# EAGLE board isp_hvp_shield_topor_02 (EAGLE 7.2.0)
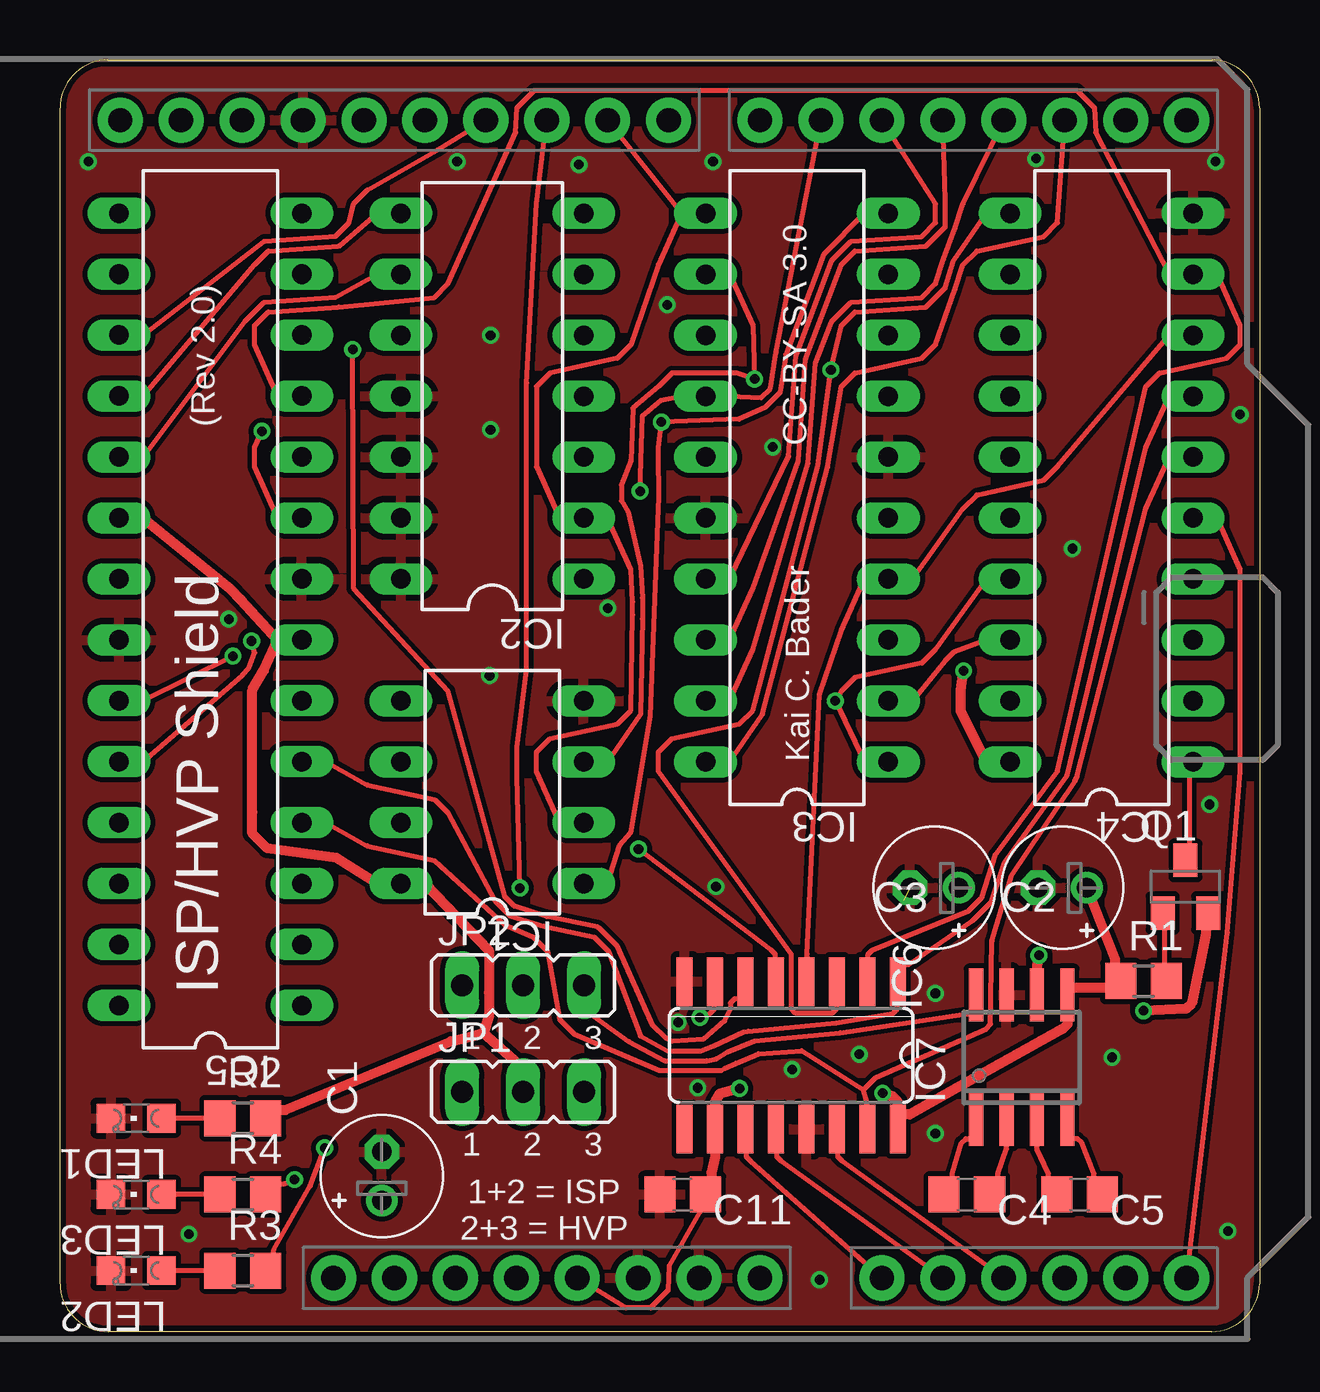
[diagram p0: board, top side]
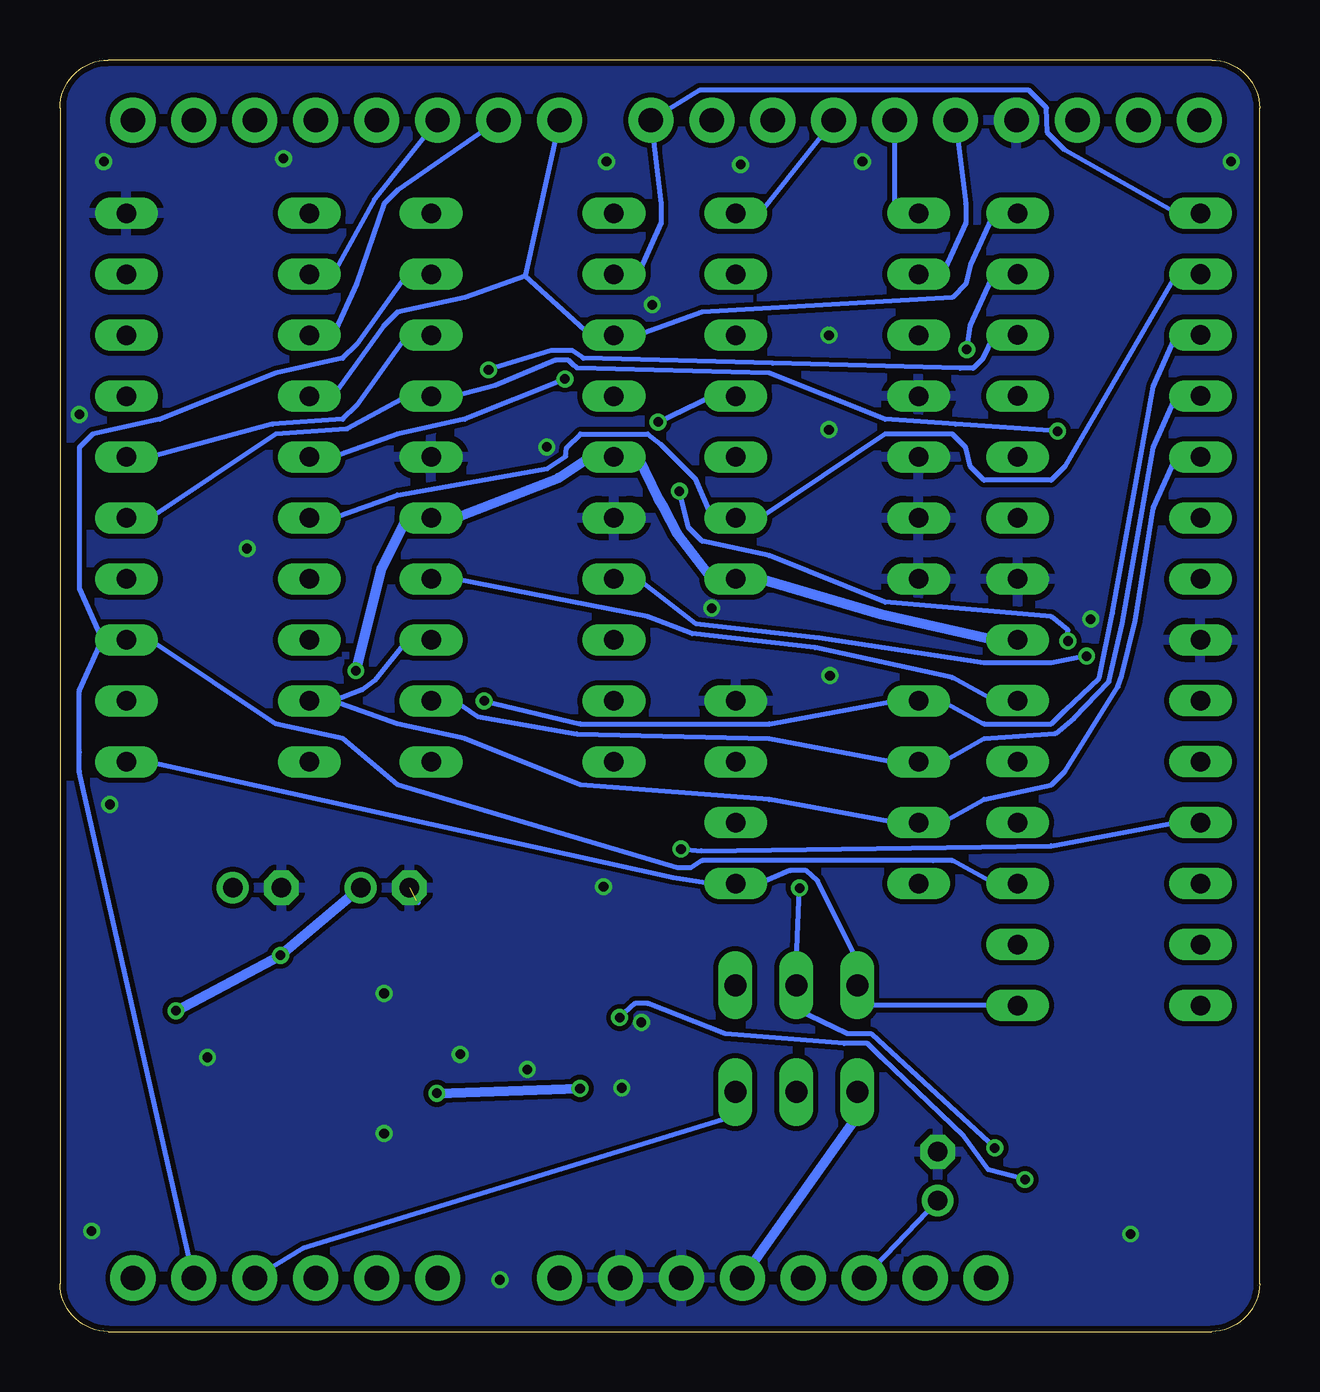
[diagram p1: board, bottom side, seen from below]

Size 50 x 53 mm. Coordinates in mm from the lower left corner, seen from the top.
Outline: 0,2 0,51 arc-90 2,53 48,53 arc-90 50,51 50,2 arc-90 48,0 2,0 arc-90 0,2
Copper layers (1*16): TOP 0.035mm / dielectric 1.5mm / BOTTOM 0.035mm
Design rules "SeeedStudio_2layer_DRU_no_angle_20140221": minimum track width 6mil, minimum drill 12mil, track to track 6mil, track to pad 6mil, pad to pad 6mil, via to via 6mil, smd to smd 0mil, copper to edge 10mil, drill to drill 10mil, minimum pad ring 10mil, minimum via ring 6mil, stop-mask expansion 2mil, vias tented up to drill 100mil, thermal gap 10mil
Net classes: 0 default: width 0.203 mm, clearance 0.203 mm

## Footprints (pad centres in the part's own frame; a part is rotated, then mirrored left to right if it is on the bottom)
E2-5 = drill 0.813 pad 1.321: + -1.016,0 | drill 0.813 pad 1.429 octagon: - 1.016,0
C0805 = smd 1.3 x 1.5: 1 -0.95,0; 2 0.95,0
DIL08 = drill 0.813 pad 1.321 long: 1 -3.81,-3.81; 2 -1.27,-3.81; 3 1.27,-3.81; 4 3.81,-3.81; 5 3.81,3.81; 6 1.27,3.81; 7 -1.27,3.81; 8 -3.81,3.81
DIL14 = drill 0.813 pad 1.321 long: 1 -7.62,-3.81; 2 -5.08,-3.81; 3 -2.54,-3.81; 4 0,-3.81; 5 2.54,-3.81; 6 5.08,-3.81; 7 7.62,-3.81; 8 7.62,3.81; 9 5.08,3.81; 10 2.54,3.81; 11 0,3.81; 12 -2.54,3.81; 13 -5.08,3.81; 14 -7.62,3.81
DIL20 = drill 0.813 pad 1.321 long: 1 -11.43,-3.81; 2 -8.89,-3.81; 3 -6.35,-3.81; 4 -3.81,-3.81; 5 -1.27,-3.81; 6 1.27,-3.81; 7 3.81,-3.81; 8 6.35,-3.81; 9 8.89,-3.81; 10 11.43,-3.81; 11 11.43,3.81; 12 8.89,3.81; 13 6.35,3.81; 14 3.81,3.81; 15 1.27,3.81; 16 -1.27,3.81; 17 -3.81,3.81; 18 -6.35,3.81; 19 -8.89,3.81; 20 -11.43,3.81
DIL28 = drill 0.813 pad 1.321 long: 1 -11.43,-3.81; 2 -8.89,-3.81; 3 -6.35,-3.81; 4 -3.81,-3.81; 5 -1.27,-3.81; 6 1.27,-3.81; 7 3.81,-3.81; 8 6.35,-3.81; 9 8.89,-3.81; 10 11.43,-3.81; 11 13.97,-3.81; 12 16.51,-3.81; 13 19.05,-3.81; 14 21.59,-3.81; 15 21.59,3.81; 16 19.05,3.81; 17 16.51,3.81; 18 13.97,3.81; 19 11.43,3.81; 20 8.89,3.81; 21 6.35,3.81; 22 3.81,3.81; 23 1.27,3.81; 24 -1.27,3.81; 25 -3.81,3.81; 26 -6.35,3.81; 27 -8.89,3.81; 28 -11.43,3.81
SO16 = smd 0.66 x 2.032: 1 -4.445,-3.073; 2 -3.175,-3.073; 3 -1.905,-3.073; 4 -0.635,-3.073; 5 0.635,-3.073; 6 1.905,-3.073; 7 3.175,-3.073; 8 4.445,-3.073; 9 4.445,3.073; 10 3.175,3.073; 11 1.905,3.073; 12 0.635,3.073; 13 -0.635,3.073; 14 -1.905,3.073; 15 -3.175,3.073; 16 -4.445,3.073
SO08 = smd 0.6 x 2.2: 1 -1.905,-2.6; 2 -0.635,-2.6; 3 0.635,-2.6; 4 1.905,-2.6; 5 1.905,2.6; 6 0.635,2.6; 7 -0.635,2.6; 8 -1.905,2.6
JP2 = drill 0.914 pad 1.422 long: 1 -2.54,0; 2 0,0; 3 2.54,0
CHIPLED_0805 = smd 1.2 x 1.2: A 0,-1.05; C 0,1.05
UNO_R3_SHIELD = drill 1.016 pad 1.88: 3.3V 50.8,26.67; 5V 50.8,29.21; A0 50.8,41.91; A1 50.8,44.45; A2 50.8,46.99; A3 50.8,49.53; A4 50.8,52.07; A5 50.8,54.61; AREF 2.54,15.24; D2 2.54,49.53; D3 2.54,46.99; D4 2.54,44.45; D5 2.54,41.91; D6 2.54,39.37; D7 2.54,36.83; D8 2.54,33.02; D9 2.54,30.48; D10 2.54,27.94; D11 2.54,25.4; D12 2.54,22.86; D13 2.54,20.32; GND@0 50.8,31.75; GND@1 50.8,34.29; GND@2 2.54,17.78; IOREF 50.8,21.59; NC 50.8,19.05; RES 50.8,24.13; RX 2.54,54.61; SCL 2.54,10.16; SDA 2.54,12.7; TX 2.54,52.07; VIN 50.8,36.83
SOT23-BEC = smd 1 x 1.4: B -0.95,-1.1; C 0,1.1; E 0.95,-1.1
R0805 = smd 1.3 x 1.5: 1 -0.95,0; 2 0.95,0

## Placement (x,y rotation side)
C1  10uF  [E2-5]  13.41,6.48 90 top
C2  4.7uF  [E2-5]  41.78,18.5 180 top
C3  4.7uF  [E2-5]  36.45,18.5 180 top
C4  0.22uF  [C0805]  37.8,5.71 180 top
C5  0.22uF  [C0805]  42.5,5.71 180 top
C11  0.1uF  [C0805]  25.95,5.71 180 top
IC1  ATtiny13/15/25/45/85  [DIL08]  18.02,22.48 90 top
IC2  ATtiny24/44/84  [DIL14]  18.02,38.99 90 top
IC3  TINY26/261/461/861  [DIL20]  30.72,35.18 90 top
IC4  ATtiny2313/4313  [DIL20]  43.42,35.18 90 top
IC5  ATMEGA328  [DIL28]  6.27,25.02 90 top
IC6  74HCT595D  [SO16]  30.48,11.51 180 top
IC7  MAX662A  [SO08]  40.09,11.43 0 top
JP1  [JP2]  19.3,9.99 0 top
JP2  [JP2]  19.3,14.43 0 top
LED1  [CHIPLED_0805]  3.17,8.89 90 top
LED2  [CHIPLED_0805]  3.17,2.54 90 top
LED3  [CHIPLED_0805]  3.17,5.71 90 top
PINS  [UNO_R3_SHIELD]  -7.65,53.03 270 top
Q1  BC858BSMD  [SOT23-BEC]  46.91,18.54 0 top
R1  47k  [R0805]  45.16,14.61 0 top
R2  220  [R0805]  7.62,8.89 0 top
R3  220  [R0805]  7.62,2.54 0 top
R4  220  [R0805]  7.62,5.71 0 top

## Library data of the parts
C1-C5 C11 R1-R4 = rcl
IC1-IC5 IC7 PINS = kaibader
IC6 = 74xx-eu
JP1 JP2 = jumper
LED1-LED3 = led
Q1 = transistor-pnp

## Nets
220: LED2.A R3.1
+5V: IC1.8 IC2.1 IC3.5 IC3.15 IC4.20 IC5.7 IC5.20 JP1.2 R2.2
A0_SCK: IC6.11 PINS.A0
A1_RCK: IC6.12 PINS.A1
A2_SER: IC6.14 PINS.A2
A3_POWER: JP1.3 PINS.A3
A4: IC3.9 IC4.3 IC5.3 PINS.A4
A5: IC3.7 IC4.5 IC5.9 PINS.A5
AREF: IC5.21
D2: IC3.20 PINS.D2
D3: IC3.19 PINS.D3
D4: IC3.18 PINS.D4
D5: IC3.17 IC4.12 IC5.23 PINS.D5
D6: IC3.14 IC4.13 IC5.24 PINS.D6
D7: IC3.13 IC4.14 IC5.14 PINS.D7
D8: IC1.3 IC3.12 IC4.15 IC5.15 PINS.D8
D9: IC1.2 IC2.2 IC3.11 IC4.16 IC5.16 PINS.D9
D10: JP2.2 PINS.D10 R3.2
D10_RESET: IC1.1 IC2.4 IC3.10 IC4.1 IC5.1 JP2.1 Q1.C
D11_MOSI: IC1.5 IC2.7 IC3.1 IC4.17 IC5.17 PINS.D11
D12_MISO: IC1.6 IC2.8 IC3.2 IC4.18 IC5.18 PINS.D12
D13_SCK: IC1.7 IC2.9 IC3.3 IC4.19 IC5.19 PINS.D13
GND: C1.- C2.- C3.- C11.2 IC1.4 IC2.11 IC2.12 IC2.13 IC2.14 IC3.6 IC3.16 IC4.10 IC5.8 IC5.22 IC6.8 IC6.13 IC7.7 LED1.C LED2.C LED3.C PINS.GND@0 PINS.GND@1 PINS.GND@2
N$1: IC7.8 JP2.3
N$2: C1.+ PINS.RES
N$3: Q1.B R1.2
N$4: C5.1 IC7.4
N$5: C5.2 IC7.3
N$6: C4.1 IC7.2
N$7: C4.2 IC7.1
N$8: LED1.A R2.1
N$10: LED3.A R4.1
Q0: IC3.8 IC4.6 IC5.4 IC6.15
Q1: IC4.7 IC5.5 IC6.1
Q2: IC4.9 IC5.11 IC6.2
Q3: IC4.11 IC5.12 IC6.3
Q4: IC3.4 IC4.8 IC5.6 IC6.4
Q5: IC5.25 IC6.5
Q6: IC5.13 IC6.6
Q7: IC6.7 R4.2
RX: PINS.RX
TX: PINS.TX
VCC: C2.+ C11.1 IC6.10 IC6.16 IC7.5 JP1.1 PINS.5V R1.1
VOUT: C3.+ IC7.6 Q1.E

## Tracks (layer width: path | path; a pad name or v marks a point on that pad's centre or on a via)
220
  TOP 0.203: R3.1 6.12,2.54 6.02,2.54 4.83,2.54 4.72,2.54 LED2.A
+5V  (via drill 0.4 pad 0.7)
  TOP 0.406: 9.08,28.83 8.5,27.54 8.01,26.73 8.01,21.66 8.01,20.77 8.64,20.14 11.52,19.74 13.21,18.67 IC1.8 15.21,18.67 17.88,15.89 17.88,14.13 17.88,13.21 17.65,12.46 | 9.08,28.83 IC5.7 9.08,28.83 | R2.2 9.02,9.23 9.22,9.23 9.39,9.23 16.3,12.1 17.23,12.31 17.65,12.46 | IC4.20 38.61,23.75 37.54,25.85 37.54,26.73 v37.67,27.54 | JP1.2 19.3,10.99 17.65,12.46 | IC5.20 3.46,33.91 7.1,30.96 7.54,30.52 9.08,28.83
  BOTTOM 0.406: v37.67,27.54 36.6,31.81 35.53,33.91 IC3.5 33.53,33.91 29.23,35.58 27.91,36.45 IC3.15 25.91,36.45 25.06,34.72 24.84,34.35 24.27,33.27 22.83,31.37 IC2.1 20.83,31.37 15.77,29.89 11.08,28.83 IC5.7
A0_SCK
  TOP 0.203: IC6.11 28.6,7.52 28.6,7.42 28.6,7.29 28.78,7.12 PINS.A0
A1_RCK
  TOP 0.203: IC6.12 29.87,7.52 29.87,7.42 29.87,7.29 30.05,7.12 PINS.A1
A2_SER
  TOP 0.203: IC6.14 32.41,7.52 32.41,7.42 32.41,7.29 32.59,7.12 PINS.A2
A3_POWER
  BOTTOM 0.203: JP1.3 21.84,8.99 39.85,3.48 PINS.A3
A4
  BOTTOM 0.203: PINS.A4 49.2,23.35 49.2,24.15 49.2,26.69 48.23,28.83 | 48.23,28.83 IC4.3 | IC3.9 35.53,44.07 37.64,41.13 38.21,40.56 41.01,39.95 45.83,38.02 48.63,37.41 49.2,36.85 49.2,31.77 49.2,30.97 48.23,28.83 | 48.23,28.83 IC4.3 | IC5.3 11.08,18.67 12.81,19.64 13.61,19.64 23.23,19.64 23.72,19.33 24.26,19.33 35.93,22.78 38.21,24.71 41.01,25.32 46.23,28.83 IC4.3
A5  (via drill 0.4 pad 0.7)
  TOP 0.203: PINS.A5 48.66,16.62 49.2,23.35 49.2,31.77 48.23,33.91 IC4.5 | IC5.9 9.08,33.91 8.11,36.05 8.11,36.85 v8.42,37.52
  BOTTOM 0.203: v8.42,37.52 12.67,37.82 15.61,38.02 20.43,39.95 28.45,40.16 28.62,40.3 28.81,40.49 29.35,40.49 31.86,39.43 33.53,38.99 IC3.7 35.53,38.99 38.02,37.63 38.07,37.62 41.01,37.41 46.23,33.91 IC4.5
D2
  TOP 0.203: IC3.20 27.91,23.75 29.27,25.7 29.28,25.75 31.99,36.02 32.56,39.39 33.13,39.95 35.93,40.56 36.5,41.13 37.31,43.44 37.64,44.47 38.21,45.03 41.01,45.64 41.58,46.21 PINS.D2
D3
  TOP 0.203: IC3.19 27.91,26.29 28.88,28.43 31.18,36.18 31.48,40.35 32.16,42.07 32.17,42.12 32.94,42.88 32.99,42.9 35.93,43.1 36.5,43.67 36.83,44.69 37.31,45.98 37.64,47.01 PINS.D3
D4
  TOP 0.203: IC3.18 27.91,28.83 28.88,30.97 30.77,36.3 31.07,40.52 32.56,44.47 33.13,45.03 36.07,45.24 36.12,45.25 36.89,46.02 36.9,46.06 36.9,47.15 PINS.D4
D5  (via drill 0.4 pad 0.7)
  TOP 0.203: IC5.23 3.46,26.29 v7.21,28.15 | IC3.17 27.91,31.37 30.36,36.47 30.67,40.65 32.16,44.61 32.17,44.66 32.94,45.42 32.99,45.44 35.93,45.64 36.5,46.21 36.5,47.01 PINS.D5
  BOTTOM 0.203: v7.21,28.15 8.68,27.87 11.48,27.87 18.36,28.91 23.48,29.5 25.91,31.37 IC3.17 | PINS.D5 36.89,47.2 38.61,44.07 IC4.12
D6  (via drill 0.4 pad 0.7)
  TOP 0.203: v24.18,35.03 24.28,38.19 25.05,38.82 25.91,38.99 IC3.14 27.91,38.99 29.23,38.92 29.61,39.31 29.85,40.81 PINS.D6 | IC5.24 3.46,23.75 7.61,27.37 7.86,27.63 8.12,28.3 v7.99,28.78
  BOTTOM 0.203: v7.99,28.78 7.99,29.23 8.68,29.8 15.61,30.4 20.43,32.34 23.23,32.94 23.8,33.51 v24.18,35.03 | PINS.D6 35.93,47.58 36.5,47.01 37.64,43.67 38.61,41.53 IC4.13
D7
  BOTTOM 0.203: IC5.14 11.08,46.61 12.05,44.47 12.24,43.67 12.81,43.1 23.23,42.49 25.91,41.53 IC3.13 27.91,41.53 30.61,43.99 | PINS.D7 30.61,43.99 | 30.61,43.99 33.13,43.1 35.93,42.49 36.5,41.93 38.61,38.99 IC4.14
D8  (via drill 0.4 pad 0.7)
  TOP 0.203: IC3.12 27.91,44.07 28.88,41.93 v28.95,39.7 28.21,39.95 25.51,39.95 24.94,39.39 23.88,38.48 23.8,36.3 23.4,35.3 23.4,34.63 23.67,34.18 24.2,31.91 24.27,30.59 24.27,29.71 24.2,25.75 24.19,25.7 22.83,23.75 IC1.3
  BOTTOM 0.203: IC5.15 3.46,46.61 8.11,49.25 8.84,49.98 8.88,51.01 9.61,51.74 23.34,51.74 PINS.D8 24.94,47.01 24.94,46.21 25.91,44.07 IC3.12 | v28.95,39.7 33.13,38.02 35.93,37.41 38.61,36.45 IC4.15
D9
  TOP 0.203: PINS.D9 25.91,46.61 | IC3.11 25.91,46.61 | 25.91,46.61 24.94,44.47 23.8,41.13 23.23,40.56 20.43,39.95 19.86,39.39 19.86,36.05 20.83,33.91 IC2.2 22.83,33.91 23.8,31.77 23.87,30.42 23.87,29.88 23.8,25.89 23.23,25.32 20.43,24.71 19.86,24.15 19.86,23.35 20.83,21.21 IC1.2
  BOTTOM 0.203: IC5.16 3.46,44.07 8.11,36.05 8.68,35.49 11.48,35.49 12.05,36.05 12.24,36.85 12.81,37.41 15.61,37.41 20.83,33.91 IC2.2 22.83,33.91 23.52,35.55 24.94,36.98 25.51,37.41 28.31,37.41 28.88,36.85 28.93,36.47 29.69,35.96 35.93,34.88 38.61,33.91 IC4.16
D10  (via drill 0.4 pad 0.7)
  TOP 0.203: R3.2 8.91,3.19 8.91,3.42 10.43,6.06 v11.03,7.65 | v19.17,18.49 19.05,23.12 19.05,24.37 19.45,27.57 19.46,39.53 19.86,47.01 PINS.D10
  BOTTOM 0.203: v11.03,7.65 16.15,12.38 16.21,12.41 17.18,12.41 19.3,13.43 JP2.2 19.3,15.43 v19.17,18.49
D10_RESET  (via drill 0.4 pad 0.7)
  TOP 0.203: IC1.1 22.83,18.67 23.33,20.26 23.8,20.81 24.61,25.66 24.94,34.31 24.96,34.76 24.96,35.3 24.94,36.05 24.94,36.85 v25.07,37.91 28.31,38.02 29.39,38.52 30.02,39.14 30.26,40.73 31.75,44.69 31.83,44.88 33.53,46.61 IC3.10 | IC4.1 47.07,23.75 47.07,20.24 Q1.C
  BOTTOM 0.203: IC4.1 46.23,23.75 24.43,18.92 22.83,18.67 IC1.1 20.83,18.67 19.57,19.22 18.9,19.22 18.42,18.78 16.76,15.43 JP2.1 16.76,13.59 IC5.1 | v25.07,37.91 22.83,38.99 IC2.4
D11_MOSI  (via drill 0.4 pad 0.7)
  TOP 0.203: IC4.17 38.61,31.37 36.5,28.43 35.93,27.86 33.13,27.25 32.56,26.69 v32.32,26.29 33.53,23.75 IC3.1 | IC5.17 3.46,41.53 8.49,45.43 8.54,45.45 11.48,45.65 12.05,46.21 12.24,47.01 12.81,47.58 15.72,49.25 PINS.D11
  BOTTOM 0.203: v32.32,26.29 28.31,25.32 20.43,25.32 15.21,26.29 IC1.5 13.21,26.29 11.48,25.33 8.68,25.33 8.11,25.89 6.68,27.25 6.13,29.93 4.43,39.39 3.46,41.53 IC5.17 | PINS.D11 20.83,46.61 IC2.7
D12_MISO
  TOP 0.203: IC4.18 38.61,28.83 37.27,28.32 36.88,27.94 35.53,26.29 IC3.2 | IC5.18 3.46,38.99 8.11,44.47 8.68,45.04 11.62,45.24 11.67,45.26 13.21,46.61 IC2.8
  BOTTOM 0.203: IC3.2 33.53,26.29 32.59,25.63 28.45,24.92 20.43,24.71 15.21,23.75 IC1.6 13.21,23.75 11.48,24.72 8.54,24.92 8.49,24.94 7.72,25.58 6.27,27.08 5.72,29.51 4.43,36.85 3.46,38.99 IC5.18 | PINS.D12 15.21,46.61 IC2.8
D13_SCK
  TOP 0.203: IC5.19 3.46,36.45 7.72,42.12 8.49,42.89 8.54,42.91 11.48,43.11 13.21,44.07 IC2.9
  BOTTOM 0.203: IC3.3 35.53,28.83 36.88,27.14 37.4,26.76 38.61,26.29 | 38.61,26.29 35.93,25.32 33.13,24.71 28.31,22.78 20.43,22.18 15.21,21.21 IC1.7 13.21,21.21 11.48,22.18 8.68,22.79 8.11,23.35 5.9,26.88 5.74,27.33 5.19,29.64 4.43,34.31 3.46,36.45 IC5.19 | 38.61,26.29 IC4.19 | PINS.D13 12.24,47.01 12.24,46.21 13.21,44.07 IC2.9
GND  (via drill 0.4 pad 0.7)  (1 unrouted)
  TOP 0.203: 24.46,6.16 C11.2 | IC6.13 31.09,9.35
  BOTTOM 0.203: 35.06,17.88 35.09,17.91 35.16,17.98
  other vias: 7.04,29.7 17.91,27.34 22.83,30.15 29.71,36.87 25.77,12.89 26.58,10.16 30.52,10.92 33.31,11.55 36.49,14.1 27.35,18.54 43.86,11.43 42.2,32.64 36.49,8.25 49.19,38.23 16.55,48.77 21.63,48.64 27.22,48.77 25.31,42.8 17.95,41.53 17.95,37.59 40.68,48.89 47.92,21.97 48.68,4.19 31.66,2.16 5.37,4.06 1.18,48.77 48.17,48.77
  pour BOTTOM: 50,0 0,0 0,53 50,53
  pour TOP: 0,53 50,53 50,0 0,0
N$1
  TOP 0.203: JP2.3 21.84,13.43 23.73,12.08 25.2,11.29 26.96,11.29 27.36,11.37 27.82,11.65 28.94,12.11 32.52,12.45 37.75,13.23 37.98,13.23 IC7.8
N$2
  BOTTOM 0.203: C1.+ PINS.RES
N$3
  TOP 0.203: Q1.B 46.04,16.84 46.04,16.74 46.04,15.36 46.04,15.25 R1.2
N$4
  TOP 0.203: C5.1 43.1,6.36 43.1,6.46 43.1,6.59 42.59,7.86 42.42,8.04 42.29,8.04 42.19,8.04 IC7.4
N$5
  TOP 0.203: C5.2 41.2,6.36 41.2,6.46 41.2,6.59 40.72,7.61 40.72,7.73 40.72,7.83 IC7.3
N$6
  TOP 0.203: C4.1 39.09,6.36 39.09,6.46 39.09,6.59 39.45,7.61 39.45,7.73 39.45,7.83 IC7.2
N$7
  TOP 0.203: C4.2 37.19,6.36 37.19,6.46 37.19,6.59 37.58,7.86 37.75,8.04 37.88,8.04 37.98,8.04 IC7.1
N$8
  TOP 0.203: R2.1 6.12,8.89 6.02,8.89 4.83,8.89 4.72,8.89 LED1.A
N$10
  TOP 0.203: R4.1 6.12,5.71 6.02,5.71 4.83,5.71 4.72,5.71 LED3.A
Q0
  TOP 0.203: IC6.15 33.63,9.35 33.63,9.58 33.49,10.06 | IC5.4 11.08,21.21 12.81,20.24 15.61,19.64 18.56,16.95 19.73,16.45 20.32,15.85 20.83,13.01 21.42,12.41 24.99,10.88 27.55,10.88 27.7,10.96 28.18,11.18 29.11,11.57 30.92,11.7 33.49,10.06 | 33.49,10.06 34.02,10.59 38.61,12.62 38.78,12.8 38.84,16.27 39.67,19.02 42.31,22.93 42.39,23.12 45.26,34.31 46.23,36.45 IC4.6
  BOTTOM 0.203: IC3.8 35.53,41.53 37.64,38.59 38.21,38.02 41.15,37.82 46.23,36.45 IC4.6
Q1
  TOP 0.203: IC5.5 11.08,23.75 12.81,22.78 15.61,22.18 16.18,21.61 18.14,17.95 18.76,17.32 20.2,16.89 22.27,16.45 22.86,15.85 24.2,12.32 25.32,11.7 26.71,11.7 27.24,11.9 28.48,12.48 28.69,12.52 32.35,12.86 34.72,13.26 34.9,13.44 34.9,13.67 IC6.1 35.15,15.29 35.38,15.29 38.05,17.14 38.82,17.91 39.39,19.57 41.97,23.16 41.98,23.2 45.26,36.85 46.23,38.99 IC4.7
Q2
  TOP 0.203: IC5.11 9.08,38.99 8.11,41.13 8.11,41.93 8.68,42.5 11.62,42.7 15.61,43.1 16.18,43.67 18.99,49.98 19.04,51.01 19.77,51.74 42.4,51.74 43.12,51.01 43.17,49.98 46.23,44.07 IC4.9 48.23,44.07 49.2,41.93 49.2,41.13 48.63,40.56 45.83,39.95 45.26,39.39 41.58,23.35 38.99,19.87 38.43,18.09 37.87,17.53 33.86,15.9 33.68,15.73 33.68,15.5 IC6.2
Q3  (via drill 0.4 pad 0.7)
  TOP 0.203: IC6.3 32.36,13.67 32.36,13.44 32.18,13.26 30.96,13.26 30.66,13.26 30.48,13.44 30.48,15.73 24.94,23.35 24.94,24.15 25.51,24.71 28.31,25.32 28.88,25.89 31.59,36.1 v32.14,40.08 32.56,41.93 33.13,42.49 36.07,42.7 36.12,42.71 36.89,43.48 36.9,43.52 37.24,44.61 37.26,44.66 38.61,46.61 IC4.11
  BOTTOM 0.203: IC5.12 11.08,41.53 11.55,40.54 11.93,40.15 12.47,40.15 20.29,40.36 28.18,40.56 28.64,40.9 29.52,40.9 v32.14,40.08
Q4
  TOP 0.203: IC6.4 31.14,15.5 31.14,15.6 31.14,15.73 31.66,26.56 32.56,29.23 33.53,31.37 IC3.4 35.53,31.37 37.64,34.31 38.21,34.88 41.01,35.48 41.58,36.05 46.23,41.53 IC4.8
  BOTTOM 0.203: IC5.6 11.08,26.29 12.81,27.25 18.52,28.5 23.65,29.09 25.51,29.8 33.53,31.37 IC3.4
Q5  (via drill 0.4 pad 0.7)
  TOP 0.203: IC6.5 29.82,15.5 29.82,15.73 29.64,15.9 v24.11,20.11
  BOTTOM 0.203: v24.11,20.11 23.26,20.04 8.68,20.25 3.46,21.21 IC5.25
Q6  (via drill 0.4 pad 0.7)
  TOP 0.203: IC6.6 28.35,13.87 28.12,13.87 27.94,13.69 27.94,13.44 27.71,12.95 26.82,12.18 25.53,12.1 25.24,12.23 24.73,12.74 23.24,16.05 22.46,16.83 22.4,16.85 20.29,17.3 18.93,17.73 18.54,18.11 16.18,26.69 12.24,30.97 v12.2,40.93
  BOTTOM 0.203: v12.2,40.93 12.05,41.93 11.08,44.07 IC5.13
Q7  (via drill 0.4 pad 0.7)
  TOP 0.203: v26.67,13.09 27.1,13.26 27.28,13.44 27.28,13.67 IC6.7 | R4.2 9.12,6.16 9.35,6.16 v9.77,6.33
  BOTTOM 0.203: v9.77,6.33 11.3,6.74 12.32,8.14 15.75,11.41 16.34,12 17.32,12.01 22.27,12.41 25.49,13.67 26.04,13.67 v26.67,13.09
VCC  (via drill 0.4 pad 0.7)
  TOP 0.203: C11.1 26.66,5.07 26.66,4.96 25.39,2.75 25.34,1.72 24.61,0.99 23.58,0.99 PINS.5V
  TOP 0.406: v28.32,10.13 27.5,9.91 27.3,9.59 IC6.10 27.3,7.28 27.15,6.63 27.15,6.26 C11.1 | v34.29,9.93 34.73,9.78 34.92,9.59 IC6.16 35.05,9.05 35.42,9.05 37.71,10.34 41.81,12.63 41.99,12.81 IC7.5 42.09,14.32 43.77,14.32 R1.1 43.97,15.15 43.97,15.52 C2.+
  BOTTOM 0.406: JP1.1 16.76,8.99 PINS.5V | v34.29,9.93 v28.32,10.13
VOUT  (via drill 0.4 pad 0.7)
  TOP 0.406: v40.81,15.68 40.72,15.25 40.72,15.13 40.72,14.93 IC7.6 | Q1.E 47.77,16.95 47.77,16.74 47.77,16.57 47.17,13.69 46.93,13.45 v45.16,13.37
  BOTTOM 0.406: v45.16,13.37 v40.81,15.68 C3.+

## Text on the board
tPlace: (Rev 2.0) | CC-BY-SA 3.0 | Kai C. Bader | ISP/HVP Shield | 1+2 = ISP / 2+3 = HVP